# Altium PCB PCB1.PcbDoc
Units mm, origin at the board's own origin, x right, y up, seen from the top; angles counter-clockwise.
Board outline 49 x 45 mm, 2 copper layers (Top Layer, Bottom Layer), stack 1.651 mm thick; 20 components, 31 nets, 283 pads, 28 vias.
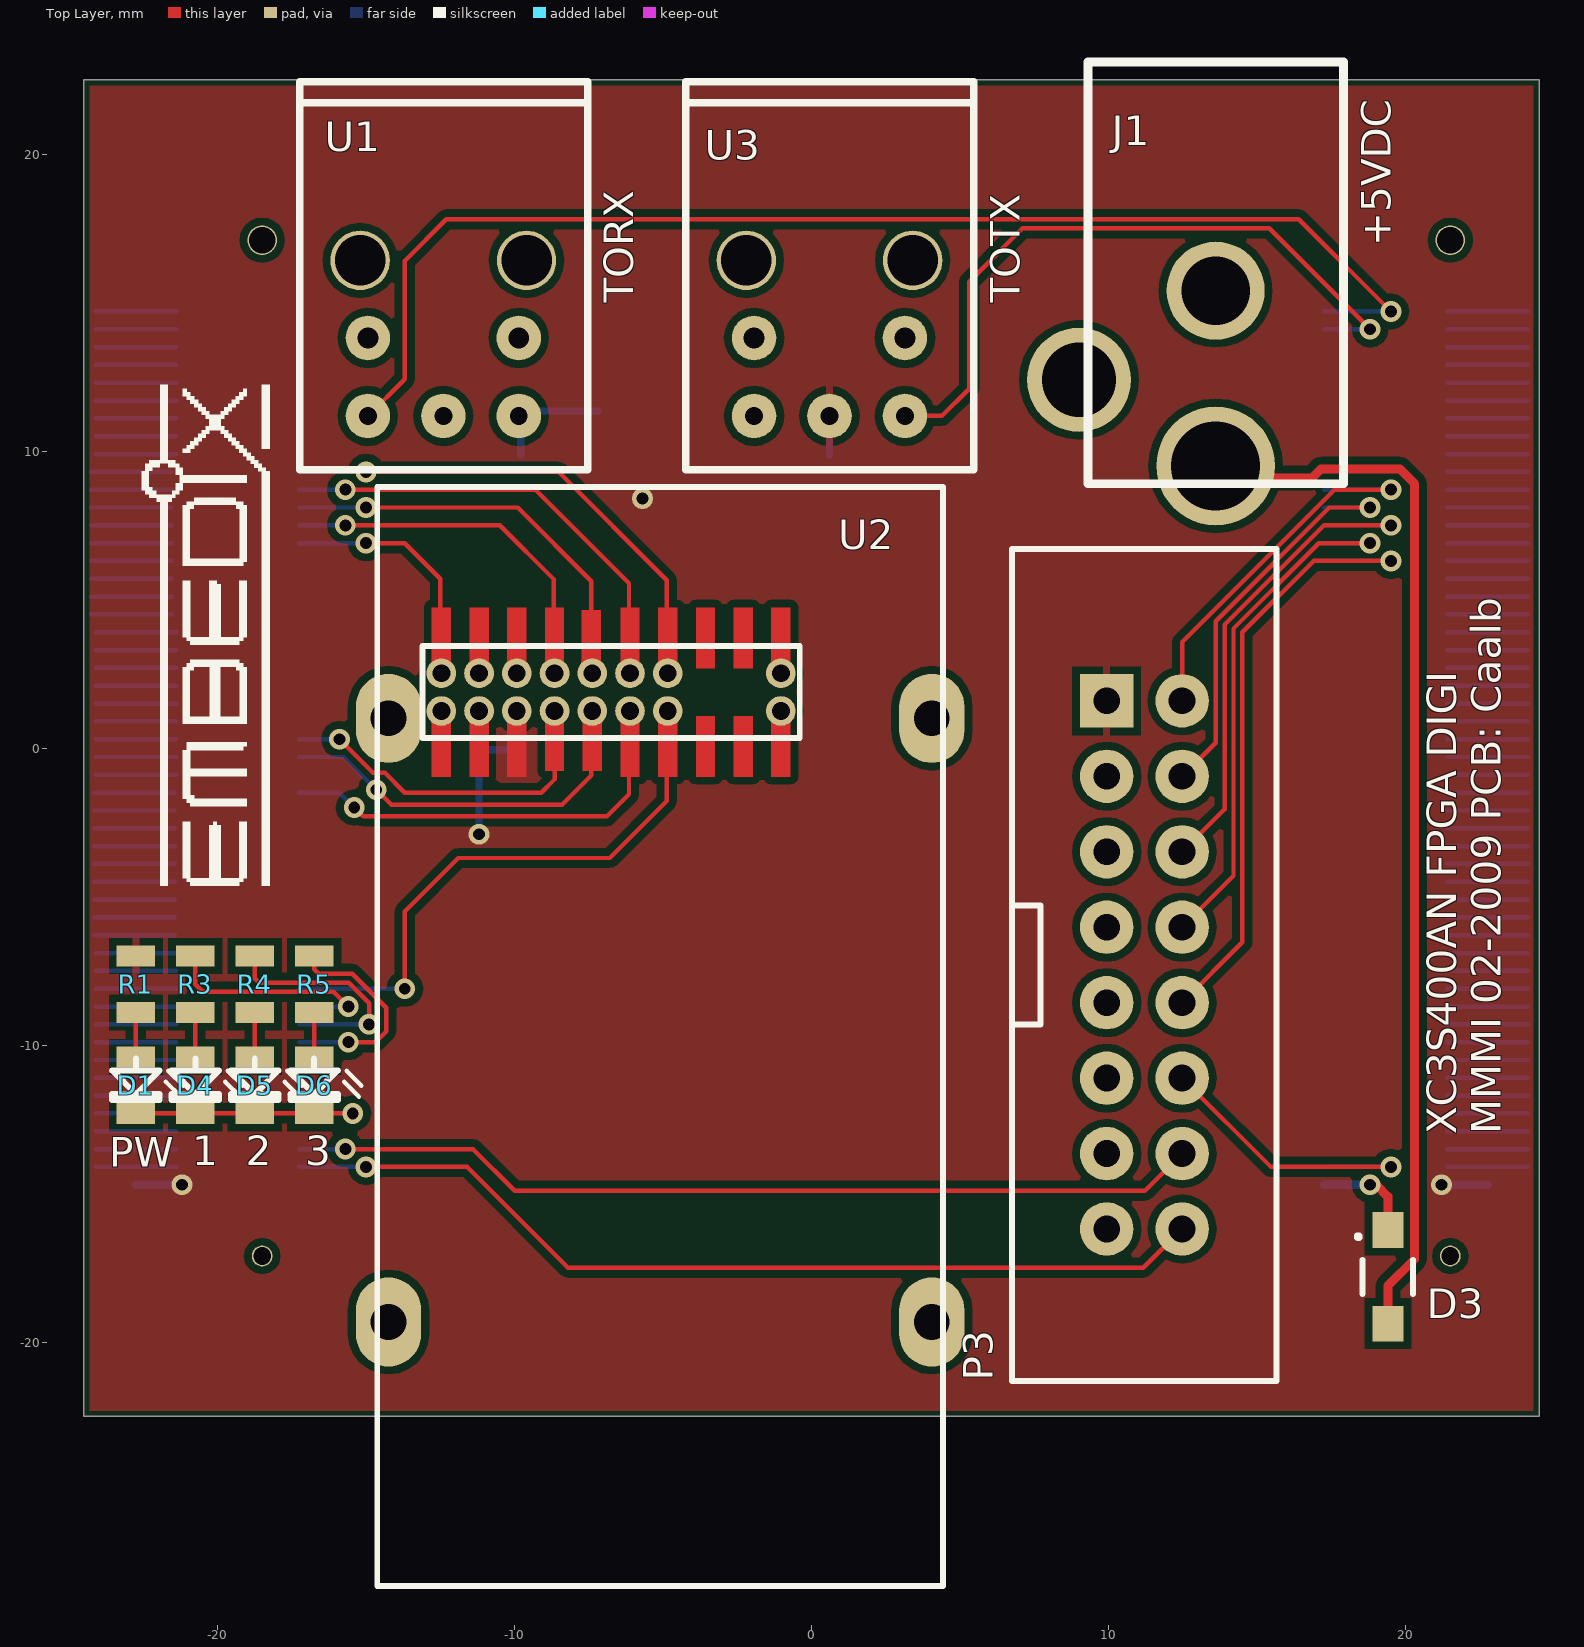
[diagram p0: Top Layer view]
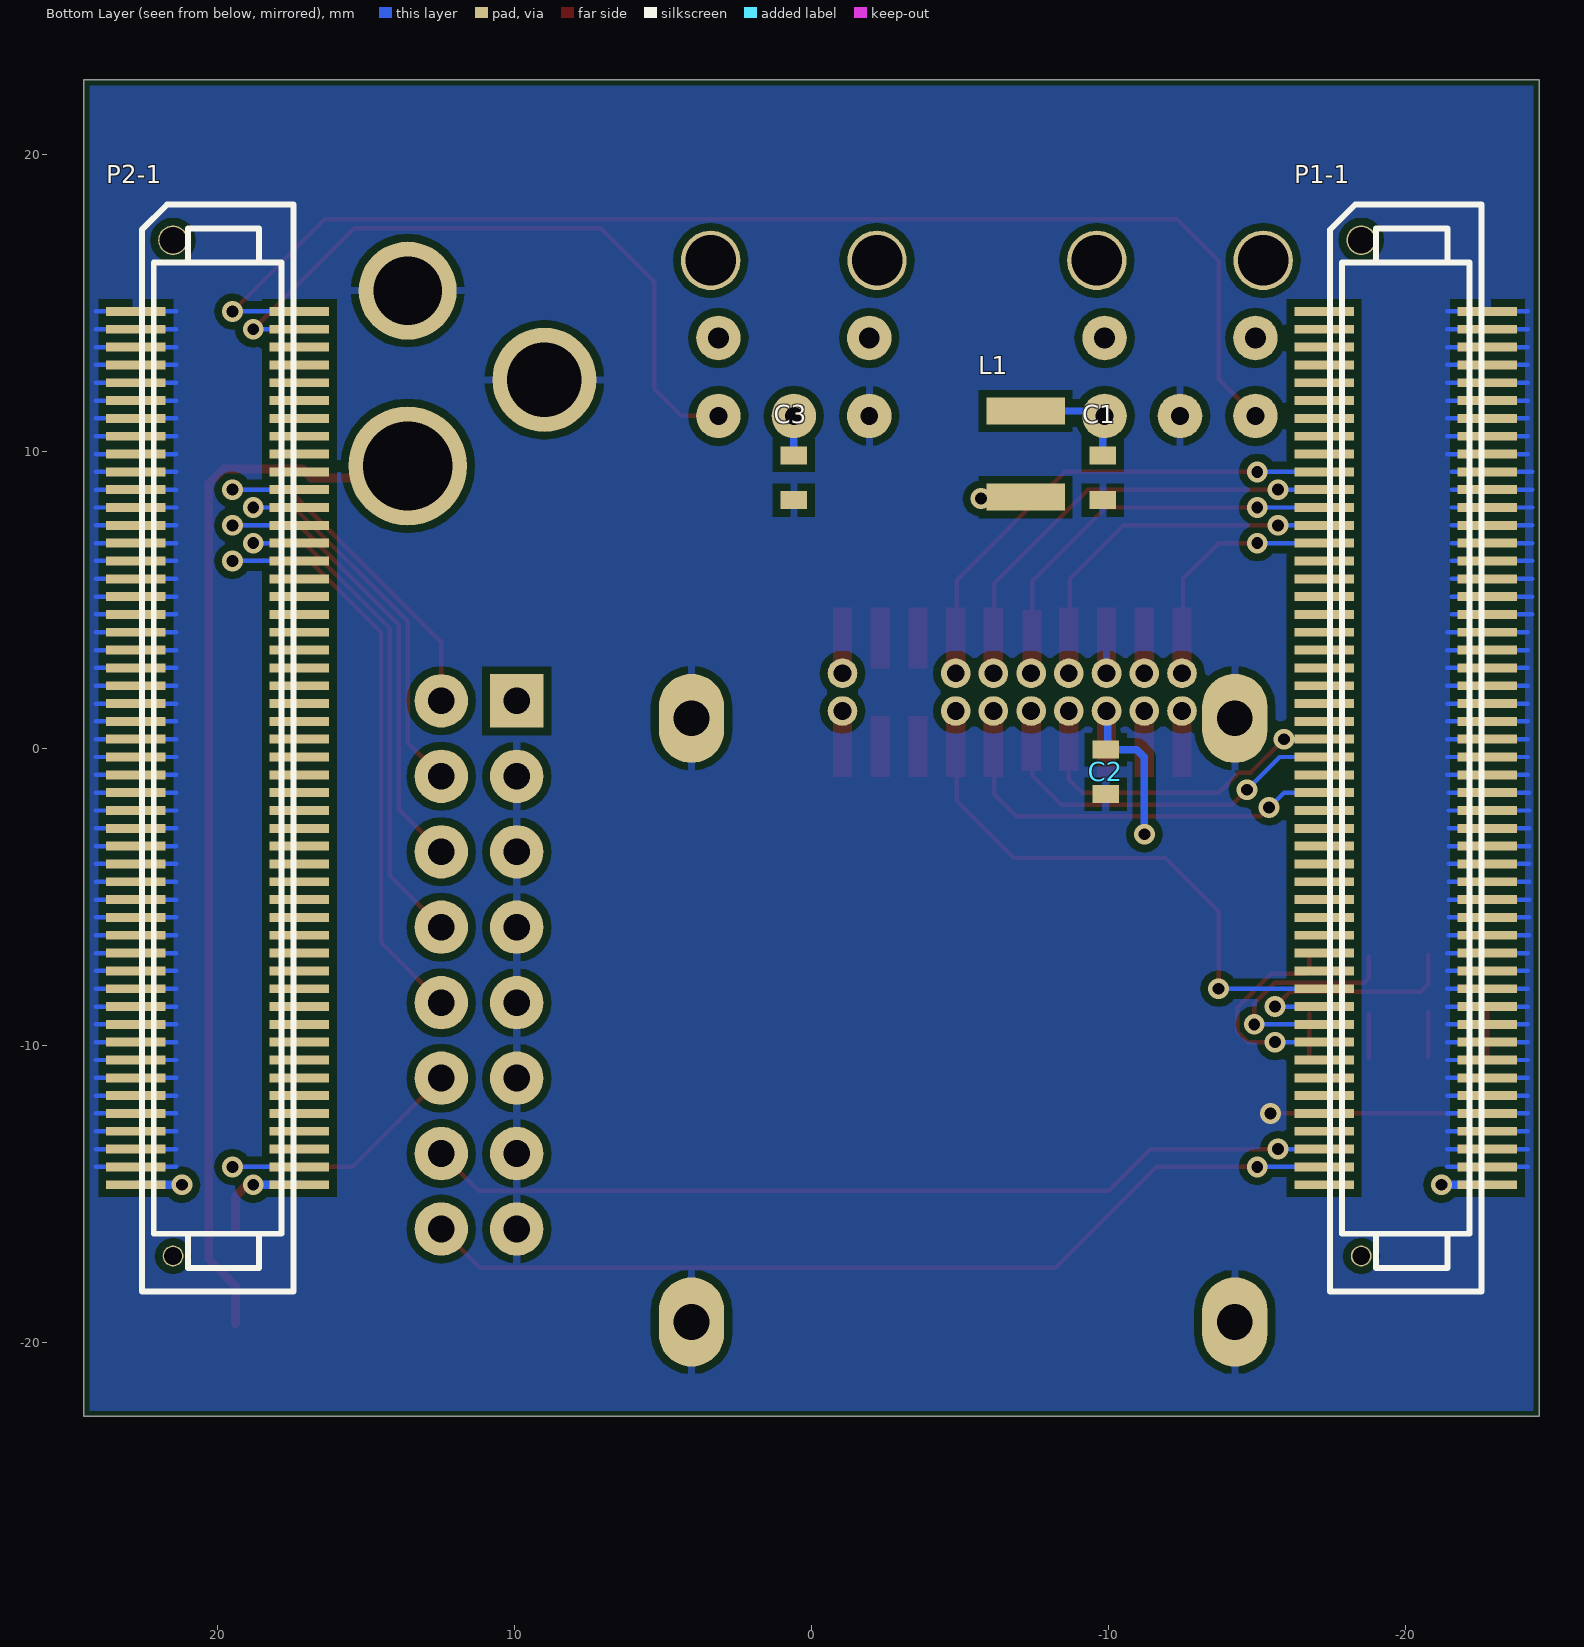
[diagram p1: Bottom Layer view, seen from below]

## Layer stack, top to bottom
Top Layer: signal copper 0.0356
Dielectric: core 1.58, FR-4, Dk 4.8
Bottom Layer: signal copper 0.0356

## Board outline
-24.5,22.5 24.5,22.5 24.5,-22.5 -24.5,-22.5

## Design rules (kind name [scope] priority, off if disabled: settings)
Clearance Clearance_1 [IsRegion] p1: gap=0.254
Clearance [all and not IsRegion] p2: gap=0.15
HoleSize [All] p1: absolutevalues=TRUE maxlimit=4 minlimit=0.025 maxpercent=80.000 minpercent=20.000
PolygonConnect PolygonConnect_1 [IsVia] p1: connectstyle=Direct reliefconductorwidth=0.254 reliefentries=2 polygonreliefangle="90 Angle"
PolygonConnect [all and not IsVia] p2: connectstyle=Relief reliefconductorwidth=0.254 reliefentries=2 polygonreliefangle="90 Angle"
RoomDefinition Sheet1 [InComponentClass('Sheet1')] p1: confinementstyle=ConfineOut formatcopy=TRUE lockcomponents=FALSE outline 25.7,-21 30.9,-21 30.9,-15.6 25.7,-15.6
RoutingVias [All] p1: holewidth=0.4 width=0.7 viastyle="Through Hole" minholewidth=0.4 minwidth=0.7 maxholewidth=0.6 maxwidth=1.2
SilkscreenOverComponentPads [All] p1: minsilkscreentomaskgap=0.254
SolderMaskExpansion [All] p1: expansion=0.102
TestPointUsage [All] p1: valid=0 allowmultiple=FALSE
Testpoint [All] p1: side=15 testpointundercomponent=TRUE minsize=1.016 maxsize=2.54 preferedsize=1.524 minholesize=0 maxholesize=1.016 preferedholesize=0.813 testpointgrid=0.025 style=1023 order=0123456789
Width [All] p1: maxlimit=0.5 minlimit=0.15 preferedwidth=0.2
22 further rules are at their usual default settings.

## Components (designator, comment, footprint, x,y, rotation, side; value= is the part's Value field where it differs from the comment)
C1 "Cap" 0603C -9.8,9.1 r90 bottom
C2 "Cap" 0603C -9.9,-0.8 r270 bottom
C3 "Cap" 0603C 0.6,9.1 r270 bottom
D1 "Green" LED0805G -22.75,-11.35 r270 top
D3 "CRS08" CRS08 19.4,-17.8 r90 top
D4 "Green" LED0805G -20.75,-11.35 r270 top
D5 "Yellow" LED0805Y -18.75,-11.35 r270 top
D6 "Red" LED0805R -16.75,-11.35 r270 top
J1 "PWR2.0" "DC FATN Ø2.0" 13.6,15.4 r180 top locked
L1 "Inductor" 1210C -7.2,9.9 r270 bottom
P1-1 "Header 50X2" FX8C-100P-SV6(91) -20,0 r270 bottom locked
P2-1 "Header 50X2" FX8C-100P-SV6(91) 20,0 r270 bottom locked
P3 "FLAD 8X2" "HDR2X8 FLAD" 11.2,-7.3 r270 top locked
R1 "0805" 0805R -22.75,-7.95 r270 top
R3 "0805" 0805R -20.75,-7.95 r270 top
R4 "0805" 0805R -18.75,-7.95 r270 top
R5 "0805" 0805R -16.75,-7.95 r270 top
U1 "TORX147" TOTX147 -12.4,13.8 r270 top locked
U2 "Digi ME" "Digi Connect ME" -5.1,-8.4 r90 top locked
U3 "TOtX147" TOTX147 0.6,13.8 r270 top locked

## Footprints (in the part's own frame and the unit in brackets; to place one, negate y for a bottom-side part, rotate by r counter-clockwise, add the part's x,y. Pads: shape width x height; smd on the part's side, far side on the other; paste and mask are expansions set on the pad)
0603C [mm]
  rect 0.6x0.9 smd mask+0.05: 1(-0.75,0) 2(0.75,0)
  body extent -0.75,-0.4 0.75,0.4, height 0.4
0805R [mm] "Resistor - MELF-R2012-0805"
  rect 0.7x1.3 smd mask+0.05: 1(-0.95,0) 2(0.95,0)
  body extent -1,-0.6 1,0.6, height 0.5
1210C [mm] "Resistor - MELF-R3216-1206"
  rect 0.9x2.64 smd: 1(-1.45,0) 2(1.45,0)
  body extent -1.5,-1.27 1.5,1.27, height 0.5
CRS08 [mm] "Molded Diode 1.5A low vf"
  rect 1.2x1.05 smd: 1(-1.575,0) 2(1.575,0)
  silkscreen extent -0.58,-0.85 1.4,1.05, body extent -1.3,-0.8 1.3,0.8, height 1
"DC FATN Ø2.0" [mm] "Lager"
  round 4 hole 3: 1(0,5.9)
  round 3.3 hole 2.3: 2(0,0)
  round 3.5 hole 2.5: 3(4.6,3)
  silkscreen extent -4.3,-7.7 4.3,6.5, body extent -4.5,-7.7 5,6.13, height 11
"Digi Connect ME" [mm]
  round 1 hole 0.6: 1(9.65,-4.063) 2(10.92,-4.063) 7(9.65,-0.253) 8(10.92,-0.253) 9(9.65,1.017) 10(10.92,1.017) 11(9.65,2.287) 12(10.92,2.287) 13(9.65,3.557) 14(10.92,3.557) 15(9.65,4.827) 16(10.92,4.827) 17(9.65,6.097) 18(10.92,6.097) 19(9.65,7.367) 20(10.92,7.367)
  oval 3x2.2 hole 1.2: 23(-10.92,-9.145) 23(-10.92,9.145) 23(9.4,-9.145) 23(9.4,9.145)
  silkscreen extent -19.81,-9.53 17.19,9.53, body extent -19.81,-9.53 17.19,9.53, height 18.5
FX8C-100P-SV6(91) [mm] "Digi-Key Part Number H11523-ND   100pin 0.6mm pitch"
  rect 0.3x2 smd: 1(-14.7,2.75) 2(-14.7,-2.75) 3(-14.1,2.75) 4(-14.1,-2.75) 5(-13.5,2.75) 6(-13.5,-2.75) 7(-12.9,2.75) 8(-12.9,-2.75) 9(-12.3,2.75) 10(-12.3,-2.75) 11(-11.7,2.75) 12(-11.7,-2.75) 13(-11.1,2.75) 14(-11.1,-2.75) 15(-10.5,2.75) 16(-10.5,-2.75) 17(-9.9,2.75) 18(-9.9,-2.75) 19(-9.3,2.75) 20(-9.3,-2.75) 21(-8.7,2.75) 22(-8.7,-2.75) 23(-8.1,2.75) 24(-8.1,-2.75) 25(-7.5,2.75) 26(-7.5,-2.75) 27(-6.9,2.75) 28(-6.9,-2.75) 29(-6.3,2.75) 30(-6.3,-2.75) 31(-5.7,2.75) 32(-5.7,-2.75) 33(-5.1,2.75) 34(-5.1,-2.75) 35(-4.5,2.75) 36(-4.5,-2.75) 37(-3.9,2.75) 38(-3.9,-2.75) 39(-3.3,2.75) 40(-3.3,-2.75) 41(-2.7,2.75) 42(-2.7,-2.75) 43(-2.1,2.75) 44(-2.1,-2.75) 45(-1.5,2.75) 46(-1.5,-2.75) 47(-0.9,2.75) 48(-0.9,-2.75) 49(-0.3,2.75) 50(-0.3,-2.75) 51(0.3,2.75) 52(0.3,-2.75) 53(0.9,2.75) 54(0.9,-2.75) 55(1.5,2.75) 56(1.5,-2.75) 57(2.1,2.75) 58(2.1,-2.75) 59(2.7,2.75) 60(2.7,-2.75) 61(3.3,2.75) 62(3.3,-2.75) 63(3.9,2.75) 64(3.9,-2.75) 65(4.5,2.75) 66(4.5,-2.75) 67(5.1,2.75) 68(5.1,-2.75) 69(5.7,2.75) 70(5.7,-2.75) 71(6.3,2.75) 72(6.3,-2.75) 73(6.9,2.75) 74(6.9,-2.75) 75(7.5,2.75) 76(7.5,-2.75) 77(8.1,2.75) 78(8.1,-2.75) 79(8.7,2.75) 80(8.7,-2.75) 81(9.3,2.75) 82(9.3,-2.75) 83(9.9,2.75) 84(9.9,-2.75) 85(10.5,2.75) 86(10.5,-2.75) 87(11.1,2.75) 88(11.1,-2.75) 89(11.7,2.75) 90(11.7,-2.75) 91(12.3,2.75) 92(12.3,-2.75) 93(12.9,2.75) 94(12.9,-2.75) 95(13.5,2.75) 96(13.5,-2.75) 97(14.1,2.75) 98(14.1,-2.75) 99(14.7,2.75) 100(14.7,-2.75)
  round 1 hole 0.9: ""(-17.1,-1.5)
  round 0.7 hole 0.6: ""(17.1,-1.5)
  silkscreen extent -18.3,-2.55 18.3,2.55, body extent -18.3,-2.55 18.3,2.55, height 4.45
"HDR2X8 FLAD" [mm]
  rect 1.8x1.8 hole 0.9: 1(-8.89,-1.27)
  round 1.8 hole 0.9: 2(-8.89,1.27) 3(-6.35,-1.27) 4(-6.35,1.27) 5(-3.81,-1.27) 6(-3.81,1.27) 7(-1.27,-1.27) 8(-1.27,1.27) 9(1.27,-1.27) 10(1.27,1.27) 11(3.81,-1.27) 12(3.81,1.27) 13(6.35,-1.27) 14(6.35,1.27) 15(8.89,-1.27) 16(8.89,1.27)
  silkscreen extent -14,-4.45 14,4.45, body extent -14,-4.45 14,4.55, height 10
LED0805G [mm] "Resistor - MELF-R2012-0805"
  rect 0.7x1.3 smd mask+0.05: 1(-0.95,0) 2(0.95,0)
  silkscreen extent -0.9,-0.8 0.5,1.59, body extent -1,-0.6 1,0.6, height 0.8
LED0805R [mm] "Resistor - MELF-R2012-0805"
  rect 0.7x1.3 smd mask+0.05: 1(-0.95,0) 2(0.95,0)
  silkscreen extent -0.9,-0.8 0.5,1.59, body extent -1,-0.6 1,0.6, height 0.8
LED0805Y [mm] "Resistor - MELF-R2012-0805"
  rect 0.7x1.3 smd mask+0.05: 1(-0.95,0) 2(0.95,0)
  silkscreen extent -0.9,-0.8 0.5,1.59, body extent -1,-0.6 1,0.6, height 0.8
TOTX147 [mm] "FIBER OPTIC"
  round 1.5 hole 0.6: 1(2.618,-2.54) 2(2.618,0) 3(2.618,2.54)
  round 1.5 hole 0.7: 4(-0.007,2.54) 5(-0.007,-2.54)
  round 2 hole 1.7: ""(-2.617,2.8) ""(-2.617,-2.8)
  silkscreen extent -8.63,-4.84 4.42,4.86, body extent -8.63,-4.84 4.42,4.86, height 9.5

## Part data
C1 C2 C3: "Capacitor"
D1 D4 D5 D6: library part LED0
D3: library part "Diode 11DQ03", "Schottky Rectifier"
J1: library part PWR2.5, "Low Voltage Power Supply Connector"
P1-1 P2-1: "FX8C-100S-SV(91)"
P3: library part "Header 8X2", "Header, 8-Pin, Dual row"
R1 R3 R4 R5: library part Res2, "Resistor"
U1: "Optic Receiving module"
U2: "Digi One ME connector"
U3: library part TOTX147, "Optic Transmitting module"

## Via types
v1: diameter 0.7, hole 0.4, Top Layer to Bottom Layer, tented both sides, 27 vias
v2: diameter 0.7, hole 0.4, Top Layer to Bottom Layer, 1 vias

## Nets (pads, with @x,y where several pads share a name; then routed paths per layer and width w, separated by ;. In a path a pad name is that pad's centre, name@x,y a point inside that pad or via, vN(x,y) a via of type N, cw(c..) or ccw(c..) an arc to the next point about the centre after c; other vN are vias at no path point)
3.3VDC: C2.1 C3.1 L1.2 P1-1.99 P2-1.100 P3.1 R1.1 U2.15 U3.2 | length 9.7
  Bottom Layer w0.25: v2(-11.2,-2.9) -11.2,-0.31 -10.94,-0.05 C2.1 ; C2.1@-10,-0.1 -9.96,-0.06 U2.15@-9.96,1.165 ; C3.1 U3.2
  Bottom Layer w0.3: P1-1.99 v1(-21.2,-14.7) ; v1(21.2,-14.7) P2-1.100
  other v1: -5.7,8.4
CTS: P1-1.52 U2.11 | length 13
  Top Layer w0.15: v1(-14.658,-1.4) -14.158,-1.9 -8.4,-1.9 -7.42,-0.92 U2.11@-7.42,1.165
  Bottom Layer w0.15: P1-1.52 -15.758,-0.3 v1(-14.658,-1.4)
DCD: P1-1.50 U2.13 | length 13.1
  Top Layer w0.15: v1(-15.9,0.3) -14.775,-0.825 -14.375,-0.825 -13.7,-1.5 -9.1,-1.5 -8.657,-1.057 U2.13 ; -8.69,0.01 U2.13@-8.69,1.165
  Bottom Layer w0.15: P1-1.50 v1(-15.9,0.3) v1@-15.8,0.3
DSR: P1-1.24 U2.12 | length 14
  Top Layer w0.15: v1(-15,8.1) -9.9,8.1 -7.42,5.62 U2.12@-7.42,2.435
  Bottom Layer w0.15: P1-1.24 v1(-15,8.1)
DTR: P1-1.22 U2.10 | length 15.5
  Top Layer w0.15: v1(-15.7,8.7) -9.3,8.7 -6.15,5.55 U2.10@-6.15,2.435
  Bottom Layer w0.15: P1-1.22 v1(-15.7,8.7)
GND: C1.1 C2.2 C3.2 D1.2 D4.2 D5.2 D6.2 J1.2 J1.3 P1-1.1 P1-1.3 P1-1.5 P1-1.7 P1-1.9 P1-1.11 P1-1.13 P1-1.15 P1-1.17 P1-1.19 P1-1.21 P1-1.23 P1-1.25 P1-1.27 P1-1.29 P1-1.31 P1-1.33 P1-1.35 P1-1.37 P1-1.39 P1-1.41 P1-1.43 P1-1.45 P1-1.47 P1-1.49 P1-1.51 P1-1.53 P1-1.55 P1-1.57 P1-1.59 P1-1.61 P1-1.63 P1-1.65 P1-1.67 P1-1.69 P1-1.71 P1-1.73 P1-1.75 P1-1.77 P1-1.79 P1-1.81 P1-1.83 P1-1.85 P1-1.87 P1-1.89 P1-1.91 P1-1.93 P1-1.95 P1-1.97 P2-1.2 P2-1.4 P2-1.6 P2-1.8 P2-1.10 P2-1.12 P2-1.14 P2-1.16 P2-1.18 P2-1.20 P2-1.22 P2-1.24 P2-1.26 P2-1.28 P2-1.30 P2-1.32 P2-1.34 P2-1.36 P2-1.38 P2-1.40 P2-1.42 P2-1.44 P2-1.46 P2-1.48 P2-1.50 P2-1.52 P2-1.54 P2-1.56 P2-1.58 P2-1.60 P2-1.62 P2-1.64 P2-1.66 P2-1.68 P2-1.70 P2-1.72 P2-1.74 P2-1.76 P2-1.78 P2-1.80 P2-1.82 P2-1.84 P2-1.86 P2-1.88 P2-1.90 P2-1.92 P2-1.94 P2-1.96 P2-1.98 P3.3 P3.5 P3.7 P3.9 P3.11 P3.13 P3.15 U1.2 U2.16 U2.23 U3.1 | length 275.1
  Top Layer w0.15: D1.2 v1(-15.45,-12.3)
  Bottom Layer w0.15: -24.255,4.5 -22.9,4.5 -21.55,4.5 ; -24.255,5.1 -22.9,5.1 -21.55,5.1 ; -24.255,5.7 -22.9,5.7 -21.55,5.7 ; -24.255,6.3 -22.9,6.3 -21.55,6.3 ; -24.255,6.9 -22.9,6.9 -21.55,6.9 ; -24.255,7.5 -22.9,7.5 -21.55,7.5 ; -24.255,8.1 -22.9,8.1 -21.55,8.1 ; -24.255,8.7 -22.9,8.7 -21.55,8.7 ; -24.255,9.3 -22.9,9.3 -21.55,9.3 ; -24.155,-6.3 -22.8,-6.3 -21.45,-6.3 ; -24.155,-5.7 -22.8,-5.7 -21.45,-5.7 ; -24.155,-5.1 -22.8,-5.1 -21.45,-5.1 ; -24.155,-4.5 -22.8,-4.5 -21.45,-4.5 ; -24.155,-3.9 -22.8,-3.9 -21.45,-3.9 ; -24.155,-3.3 -22.8,-3.3 -21.45,-3.3 ; -24.155,-2.7 -22.8,-2.7 -21.45,-2.7 ; -24.155,-2.1 -22.8,-2.1 -21.45,-2.1 ; -24.155,-1.5 -22.8,-1.5 -21.45,-1.5 ; -24.105,-14.1 P1-1.97 -21.4,-14.1 ; -24.105,-13.5 P1-1.95 -21.4,-13.5 ; -24.105,-12.9 P1-1.93 -21.4,-12.9 ; -24.105,-12.3 P1-1.91 -21.4,-12.3 ; -24.105,-11.7 P1-1.89 -21.4,-11.7 ; -24.105,-11.1 P1-1.87 -21.4,-11.1 ; -24.105,-10.5 P1-1.85 -21.4,-10.5 ; -24.105,-9.9 P1-1.83 -21.4,-9.9 ; -24.105,-9.3 P1-1.81 -21.4,-9.3 ; -24.105,-8.7 P1-1.79 -21.4,-8.7 ; -24.105,-8.1 P1-1.77 -21.4,-8.1 ; -24.105,-7.5 P1-1.75 -21.4,-7.5 ; -24.105,-6.9 P1-1.73 -21.4,-6.9 ; -24.105,-0.9 P1-1.53 -21.4,-0.9 ; -24.105,-0.3 P1-1.51 -21.4,-0.3 ; -24.105,0.3 P1-1.49 -21.4,0.3 ; -24.105,0.9 P1-1.47 -21.4,0.9 ; -24.105,1.5 P1-1.45 -21.4,1.5 ; -24.105,2.1 P1-1.43 -21.4,2.1 ; -24.105,2.7 P1-1.41 -21.4,2.7 ; -24.105,3.3 P1-1.39 -21.4,3.3 ; -24.105,3.9 P1-1.37 -21.4,3.9 ; -24.105,9.9 P1-1.17 -21.4,9.9 ; -24.105,10.5 P1-1.15 -21.4,10.5 ; -24.105,11.1 P1-1.13 -21.4,11.1 ; -24.105,11.7 P1-1.11 -21.4,11.7 ; -24.105,12.3 P1-1.9 -21.4,12.3 ; -24.105,12.9 P1-1.7 -21.4,12.9 ; -24.105,13.5 P1-1.5 -21.4,13.5 ; -24.105,14.1 P1-1.3 ; -24.105,14.7 P1-1.1 -21.4,14.7 ; P1-1.3 -21.4,14.1 ; 21.395,-14.1 P2-1.98 24.1,-14.1 ; 21.395,-13.5 P2-1.96 24.1,-13.5 ; 21.395,-12.9 P2-1.94 24.1,-12.9 ; 21.395,-12.3 P2-1.92 24.1,-12.3 ; 21.395,-11.1 P2-1.88 24.1,-11.1 ; 21.395,-10.5 P2-1.86 24.1,-10.5 ; 21.395,-9.9 P2-1.84 24.1,-9.9 ; 21.395,-9.3 P2-1.82 24.1,-9.3 ; 21.395,-8.7 P2-1.80 24.1,-8.7 ; 21.395,-8.1 P2-1.78 24.1,-8.1 ; 21.395,-7.5 P2-1.76 24.1,-7.5 ; 21.395,-6.9 P2-1.74 24.1,-6.9 ; 21.395,-6.3 P2-1.72 24.1,-6.3 ; 21.395,-5.7 P2-1.70 24.1,-5.7 ; 21.395,-5.1 P2-1.68 24.1,-5.1 ; 21.395,-4.5 P2-1.66 24.1,-4.5 ; 21.395,-3.9 P2-1.64 24.1,-3.9 ; 21.395,-3.3 P2-1.62 24.1,-3.3 ; 21.395,-2.7 P2-1.60 24.1,-2.7 ; 21.395,-2.1 P2-1.58 24.1,-2.1 ; 21.395,-1.5 P2-1.56 24.1,-1.5 ; 21.395,-0.9 P2-1.54 24.1,-0.9 ; 21.395,-0.3 P2-1.52 24.1,-0.3 ; 21.395,0.3 P2-1.50 24.1,0.3 ; 21.395,0.9 P2-1.48 24.1,0.9 ; 21.395,1.5 P2-1.46 24.1,1.5 ; 21.395,2.1 P2-1.44 24.1,2.1 ; 21.395,2.7 P2-1.42 24.1,2.7 ; 21.395,3.3 P2-1.40 24.1,3.3 ; 21.395,3.9 P2-1.38 24.1,3.9 ; 21.395,4.5 P2-1.36 24.1,4.5 ; 21.395,5.1 P2-1.34 24.1,5.1 ; 21.395,5.7 P2-1.32 24.1,5.7 ; 21.395,6.3 P2-1.30 24.1,6.3 ; 21.395,6.9 P2-1.28 24.1,6.9 ; 21.395,7.5 P2-1.26 24.1,7.5 ; 21.395,8.1 P2-1.24 24.1,8.1 ; 21.395,8.7 P2-1.22 24.1,8.7 ; 21.395,9.3 P2-1.20 24.1,9.3 ; 21.395,9.9 P2-1.18 24.1,9.9 ; 21.395,10.5 P2-1.16 24.1,10.5 ; 21.395,11.1 P2-1.14 24.1,11.1 ; 21.395,11.7 P2-1.12 24.1,11.7 ; 21.395,12.3 P2-1.10 24.1,12.3 ; 21.395,12.9 P2-1.8 24.1,12.9 ; 21.395,13.5 P2-1.6 24.1,13.5 ; 21.395,14.1 P2-1.4 24.1,14.1 ; 21.395,14.7 P2-1.2 24.1,14.7 ; P2-1.90 24.1,-11.7 P2-1.90 ; P2-1.90 21.395,-11.7 P2-1.90
INIT: P1-1.28 U2.20 | length 8.5
  Top Layer w0.15: v1(-15,6.9) -13.7,6.9 -12.5,5.7 U2.20@-12.5,2.435
  Bottom Layer w0.15: P1-1.28 v1(-15,6.9)
LED1: P1-1.80 R3.1 | length 8.1
  Top Layer w0.15: R3.1@-20.75,-6.95 R3.1 -20.75,-7.95 -20.5,-8.2 -16.1,-8.2 v1(-15.6,-8.7)
  Bottom Layer w0.15: P1-1.80 v1(-15.6,-8.7)
LED2: P1-1.82 R4.1 | length 8
  Top Layer w0.15: R4.1 -18.75,-7.75 -18.6,-7.9 -15.587,-7.9 -14.9,-8.587 v1(-14.9,-9.3)
  Bottom Layer w0.15: P1-1.82 v1(-14.9,-9.3)
LED3: P1-1.84 R5.1 | length 7.3
  Top Layer w0.15: R5.1 -16.75,-7.45 -16.6,-7.6 -15.463,-7.6 -14.325,-8.738 -14.325,-9.538 -14.687,-9.9 v1(-15.6,-9.9)
  Bottom Layer w0.15: P1-1.84 v1(-15.6,-9.9)
NetC1_2: C1.2 L1.1 U1.3 | length 4.2
  Bottom Layer w0.25: C1.2 -9.8,11.122 U1.3 ; U1.3@-9.8,11.3 -9.86,11.24 U1.3 ; L1.1 -9.692,11.35 U1.3
NetD1_1: D1.1 R1.2 | length 1.5
  Top Layer w0.15: D1.1 R1.2
NetD3_1: D3.1 J1.1 | length 35.7
  Top Layer w0.3: J1.1@13.6,9.1 16.85,9.1 17.15,9.4 19.8,9.4 20.3,8.9 20.3,-17.2 19.4,-18.1 D3.1
NetD4_1: D4.1 R3.2 | length 1.5
  Top Layer w0.15: D4.1 R3.2
NetD5_1: D5.1 R4.2 | length 1.5
  Top Layer w0.15: D5.1@-18.75,-10.45 R4.2@-18.75,-8.95
NetD6_1: D6.1 R5.2 | length 1.5
  Top Layer w0.15: D6.1@-16.75,-10.45 R5.2@-16.75,-8.95
P3_2: P2-1.21 P3.2 | length 13.4
  Top Layer w0.15: P3.2 12.47,3.569 17.601,8.7 v1(19.5,8.7)
  Bottom Layer w0.15: P2-1.21 v1(19.5,8.7)
P3_4: P2-1.23 P3.4 | length 14
  Top Layer w0.15: P3.4 13.6,0.18 13.6,4.274 17.426,8.1 v1(18.8,8.1)
  Bottom Layer w0.15: P2-1.23 v1(18.8,8.1)
P3_6: P2-1.25 P3.6 | length 17.5
  Top Layer w0.15: P3.6 13.9,-2.06 13.9,4.15 17.25,7.5 v1(19.5,7.5)
  Bottom Layer w0.15: P2-1.25 v1(19.5,7.5)
P3_8: P2-1.27 P3.8 | length 18.1
  Top Layer w0.15: P3.8 14.2,-4.3 14.2,4.026 17.074,6.9 v1(18.8,6.9)
  Bottom Layer w0.15: P2-1.27 v1(18.8,6.9)
P3_10: P2-1.29 P3.10 | length 21.7
  Top Layer w0.15: P3.10@12.5,-8.4 12.47,-8.43 P3.10 14.5,-6.54 14.5,3.901 16.899,6.3 v1(19.5,6.3)
  Bottom Layer w0.15: P2-1.29 v1(19.5,6.3)
P3_12: P2-1.97 P3.12 | length 10.5
  Top Layer w0.15: P3.12 15.46,-14.1 v1(19.5,-14.1)
  Bottom Layer w0.15: P2-1.97 v1(19.5,-14.1)
P3_14: P1-1.96 P3.14 | length 30.8
  Top Layer w0.15: v1(-15.7,-13.5) -11.4,-13.5 -10,-14.9 11.22,-14.9 P3.14
  Bottom Layer w0.15: P1-1.96 v1(-15.7,-13.5)
P3_16: P1-1.98 P3.16 | length 31.7
  Top Layer w0.15: v1(-15,-14.1) -11.6,-14.1 -8.206,-17.494 11.166,-17.494 P3.16
  Bottom Layer w0.15: P1-1.98 v1(-15,-14.1)
RESET: P1-1.26 U2.14 | length 12.6
  Top Layer w0.15: v1(-15.7,7.5) -10.5,7.5 -8.69,5.69 U2.14@-8.69,2.435
  Bottom Layer w0.15: P1-1.26 v1(-15.7,7.5)
RTS: P1-1.56 U2.9 | length 14.5
  Top Layer w0.15: v1(-15.4,-2) -15.1,-2.3 -6.9,-2.3 -6.15,-1.55 U2.9@-6.15,1.165
  Bottom Layer w0.15: P1-1.56 -15.9,-1.5 v1(-15.4,-2)
RXD: P1-1.78 U2.7 | length 19.5
  Top Layer w0.15: v1(-13.7,-8.1) -13.7,-5.5 -11.9,-3.7 -6.8,-3.7 -4.88,-1.78 U2.7@-4.88,1.165
  Bottom Layer w0.15: P1-1.78 v1(-13.7,-8.1)
TORX1: P2-1.1 U1.1 | length 43
  Top Layer w0.15: U1.1 -13.7,12.422 -13.7,16.4 -12.3,17.8 16.4,17.8 v1(19.5,14.7)
  Bottom Layer w0.15: P2-1.1 v1(19.5,14.7)
TOTX1: P2-1.3 U3.3 | length 23.3
  Top Layer w0.15: U3.3 4.382,11.182 5.3,12.1 5.3,15.7 7.1,17.5 15.4,17.5 v1(18.8,14.1)
  Bottom Layer w0.15: P2-1.3 v1(18.8,14.1)
TXD: P1-1.20 U2.8 | length 17.1
  Top Layer w0.15: v1(-15,9.3) -8.525,9.3 -4.88,5.655 U2.8@-4.88,2.435
  Bottom Layer w0.15: P1-1.20 v1(-15,9.3)
VIN: D3.2 P2-1.99 | length 3.4
  Top Layer w0.3: v1(18.8,-14.7) 19,-14.7 19.4,-15.1 D3.2
  Bottom Layer w0.3: P2-1.99 v1(18.8,-14.7)
pads on no net: P1-1. P1-1.2 P1-1.4 P1-1.6 P1-1.8 P1-1.10 P1-1.12 P1-1.14 P1-1.16 P1-1.18 P1-1.30 P1-1.32 P1-1.34 P1-1.36 P1-1.38 P1-1.40 P1-1.42 P1-1.44 P1-1.46 P1-1.48 P1-1.54 P1-1.58 P1-1.60 P1-1.62 P1-1.64 P1-1.66 P1-1.68 P1-1.70 P1-1.72 P1-1.74 P1-1.76 P1-1.86 P1-1.88 P1-1.90 P1-1.92 P1-1.94 P1-1.100 P2-1. P2-1.5 P2-1.7 P2-1.9 P2-1.11 P2-1.13 P2-1.15 P2-1.17 P2-1.19 P2-1.31 P2-1.33 P2-1.35 P2-1.37 P2-1.39 P2-1.41 P2-1.43 P2-1.45 P2-1.47 P2-1.49 P2-1.51 P2-1.53 P2-1.55 P2-1.57 P2-1.59 P2-1.61 P2-1.63 P2-1.65 P2-1.67 P2-1.69 P2-1.71 P2-1.73 P2-1.75 P2-1.77 P2-1.79 P2-1.81 P2-1.83 P2-1.85 P2-1.87 P2-1.89 P2-1.91 P2-1.93 P2-1.95 U1. U1.4 U1.5 U2.1 U2.2 U2.17 U2.18 U2.19 U3. U3.4 U3.5

## Polygon pours and split planes (outlines as drawn)
3.3VDC on Top Layer "3.3VDC TOP" (solid, remove dead copper, pour order 1000): -24.3,22.3 24.3,22.3 24.3,-22.3 -24.3,-22.3 -24.3,22.3
GND on Bottom Layer "GND" (solid, remove dead copper, pour order 1001): -24.3,22.3 24.3,22.3 24.3,-22.3 -24.3,-22.3

## Other copper
Top Layer:
  region: -3.252,-0.965 -3.252,1.085 -3.902,1.085 -3.902,-0.965
  region: -1.982,-0.965 -1.982,1.085 -2.632,1.085 -2.632,-0.965
  region: -2.632,4.735 -2.632,2.685 -1.982,2.685 -1.982,4.735
  region: -3.902,4.735 -3.902,2.685 -3.252,2.685 -3.252,4.735
  region: -12.142,-0.965 -12.142,1.085 -12.792,1.085 -12.792,-0.965
  region: -10.872,-0.965 -10.872,1.085 -11.522,1.085 -11.522,-0.965
  region net 3.3VDC: -9.602,-0.965 -9.602,1.085 -10.252,1.085 -10.252,-0.965
  region net DCD: -8.332,-0.765 -8.332,1.285 -8.982,1.285 -8.982,-0.765
  region net CTS: -7.062,-0.765 -7.062,1.285 -7.712,1.285 -7.712,-0.765
  region net RTS: -5.792,-0.965 -5.792,1.085 -6.442,1.085 -6.442,-0.965
  region net RXD: -4.522,-0.965 -4.522,1.085 -5.172,1.085 -5.172,-0.965
  region: -0.712,-0.965 -0.712,1.085 -1.362,1.085 -1.362,-0.965
  region: -1.362,4.735 -1.362,2.685 -0.712,2.685 -0.712,4.735
  region net TXD: -5.172,4.735 -5.172,2.685 -4.522,2.685 -4.522,4.735
  region net DTR: -6.442,4.735 -6.442,2.685 -5.792,2.685 -5.792,4.735
  region net DSR: -7.745,4.65 -7.745,2.6 -7.095,2.6 -7.095,4.65
  region net RESET: -8.982,4.735 -8.982,2.685 -8.332,2.685 -8.332,4.735
  region net GND: -10.252,4.735 -10.252,2.685 -9.602,2.685 -9.602,4.735
  region: -11.522,4.735 -11.522,2.685 -10.872,2.685 -10.872,4.735
  region net INIT: -12.792,4.735 -12.792,2.685 -12.142,2.685 -12.142,4.735

## Silkscreen, mask and mechanical layers (free items; w line width, h text height)
Top Overlay:
  drawing of 8 lines, arcs and shapes, not listed
  text "+5VDC" at 19.5,16.9 h1 r90
  text "TORX" at -6,15 h1 r90
  text "TOTX" at 7,15 h1 r90
  text "XC3S400AN FPGA DIGI" at 21.7,-13 h1 r90
  text "MMMI 02-2009 PCB: Caalb" at 23.2,-13 h1 r90
  text "1" at -20.85,-14.05 h1
  text "2" at -19.05,-14.05 h1
  text "3" at -17.05,-14.05 h1
  text "PW" at -23.65,-14.1 h1
Top Solder:
  region: -3.152,-1.065 -3.152,1.185 -4.002,1.185 -4.002,-1.065
  region: -1.882,-1.065 -1.882,1.185 -2.732,1.185 -2.732,-1.065
  region: -2.732,4.835 -2.732,2.585 -1.882,2.585 -1.882,4.835
  region: -4.002,4.835 -4.002,2.585 -3.152,2.585 -3.152,4.835
  region: -12.042,-1.065 -12.042,1.185 -12.892,1.185 -12.892,-1.065
  region: -10.772,-1.065 -10.772,1.185 -11.622,1.185 -11.622,-1.065
  region: -9.502,-1.065 -9.502,1.185 -10.352,1.185 -10.352,-1.065
  region: -8.232,-0.865 -8.232,1.385 -9.082,1.385 -9.082,-0.865
  region: -6.962,-0.865 -6.962,1.385 -7.812,1.385 -7.812,-0.865
  region: -5.692,-1.065 -5.692,1.185 -6.542,1.185 -6.542,-1.065
  region: -4.422,-1.065 -4.422,1.185 -5.272,1.185 -5.272,-1.065
  region: -0.612,-1.065 -0.612,1.185 -1.462,1.185 -1.462,-1.065
  region: -1.462,4.835 -1.462,2.585 -0.612,2.585 -0.612,4.835
  region: -5.272,4.835 -5.272,2.585 -4.422,2.585 -4.422,4.835
  region: -6.542,4.835 -6.542,2.585 -5.692,2.585 -5.692,4.835
  region: -7.845,4.75 -7.845,2.5 -6.995,2.5 -6.995,4.75
  region: -9.082,4.835 -9.082,2.585 -8.232,2.585 -8.232,4.835
  region: -10.352,4.835 -10.352,2.585 -9.502,2.585 -9.502,4.835
  region: -11.622,4.835 -11.622,2.585 -10.772,2.585 -10.772,4.835
  region: -12.892,4.835 -12.892,2.585 -12.042,2.585 -12.042,4.835
Mechanical 1:
  the board outline again, w0.254